# Altium PCB 智能车主板.PcbDoc (part 1 of 2)
Units mm, origin at the board's own origin, x right, y up, seen from the top; angles counter-clockwise.
Board outline 100.45 x 65.28 mm, 4 copper layers (Top, GND02, PWR03, Bottom), stack 0.603 mm thick; 92 components, 74 nets, 364 pads, 217 vias.
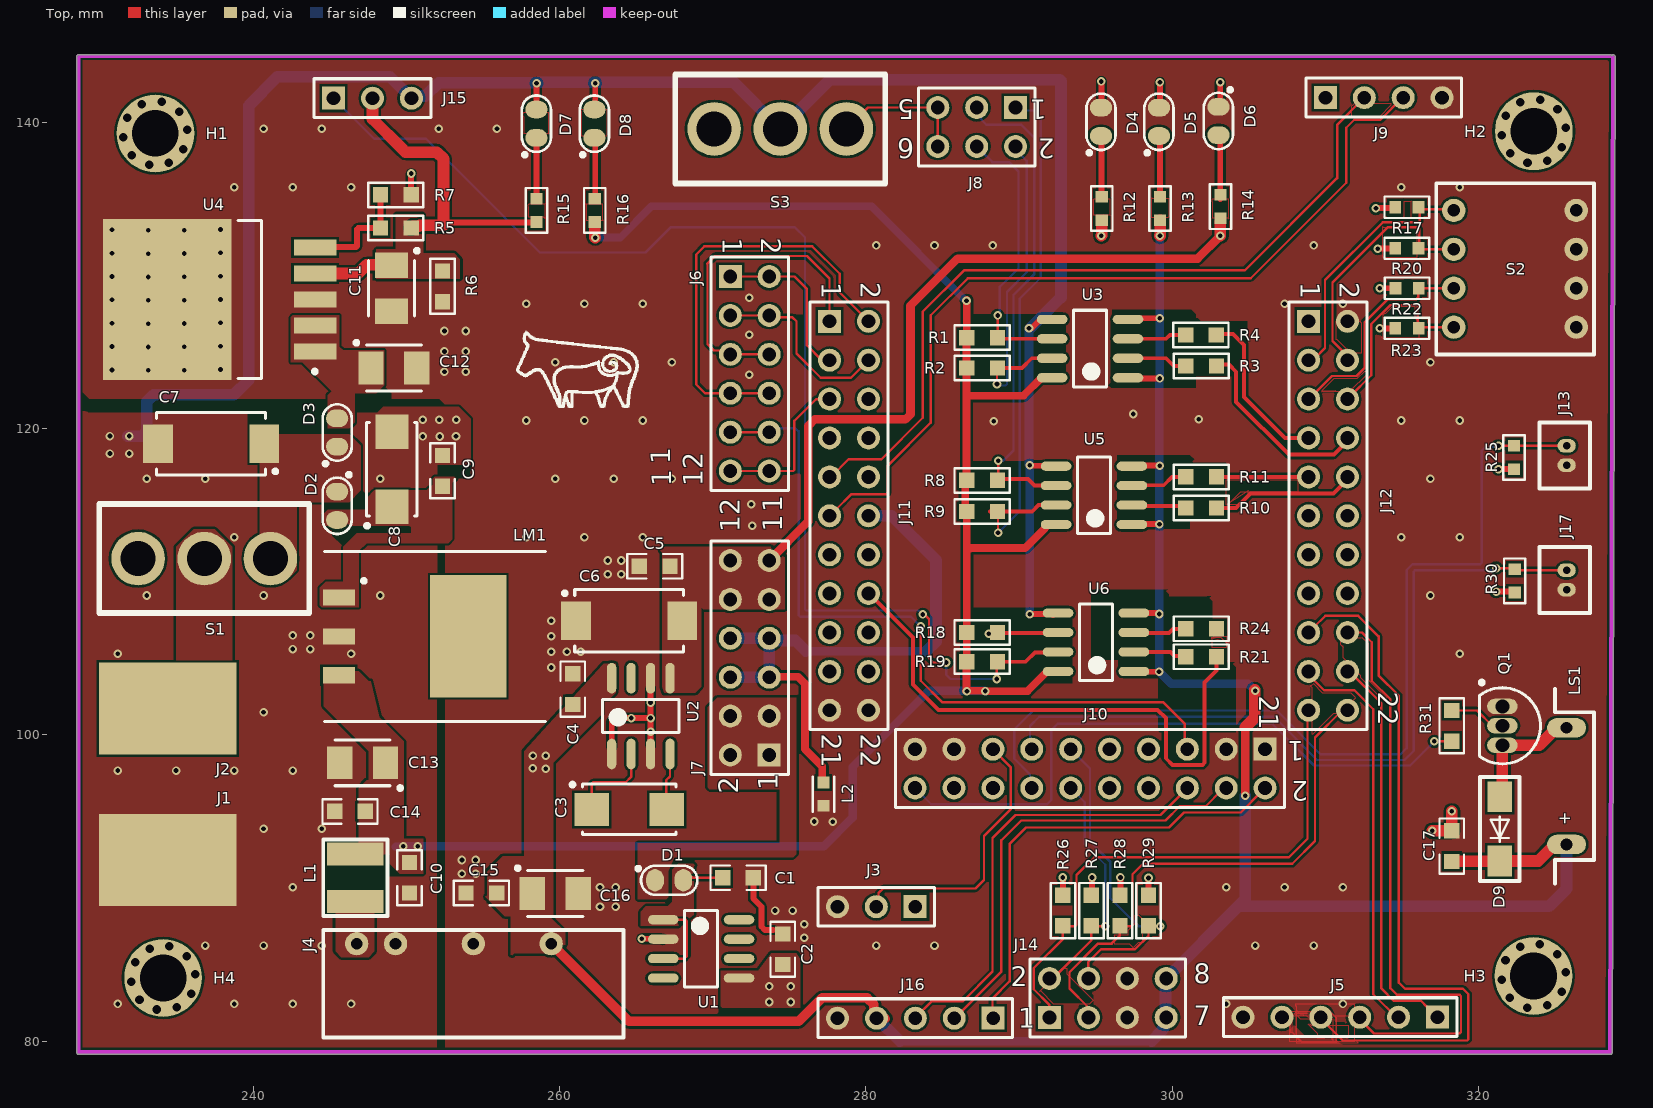
[diagram p0: Top view]
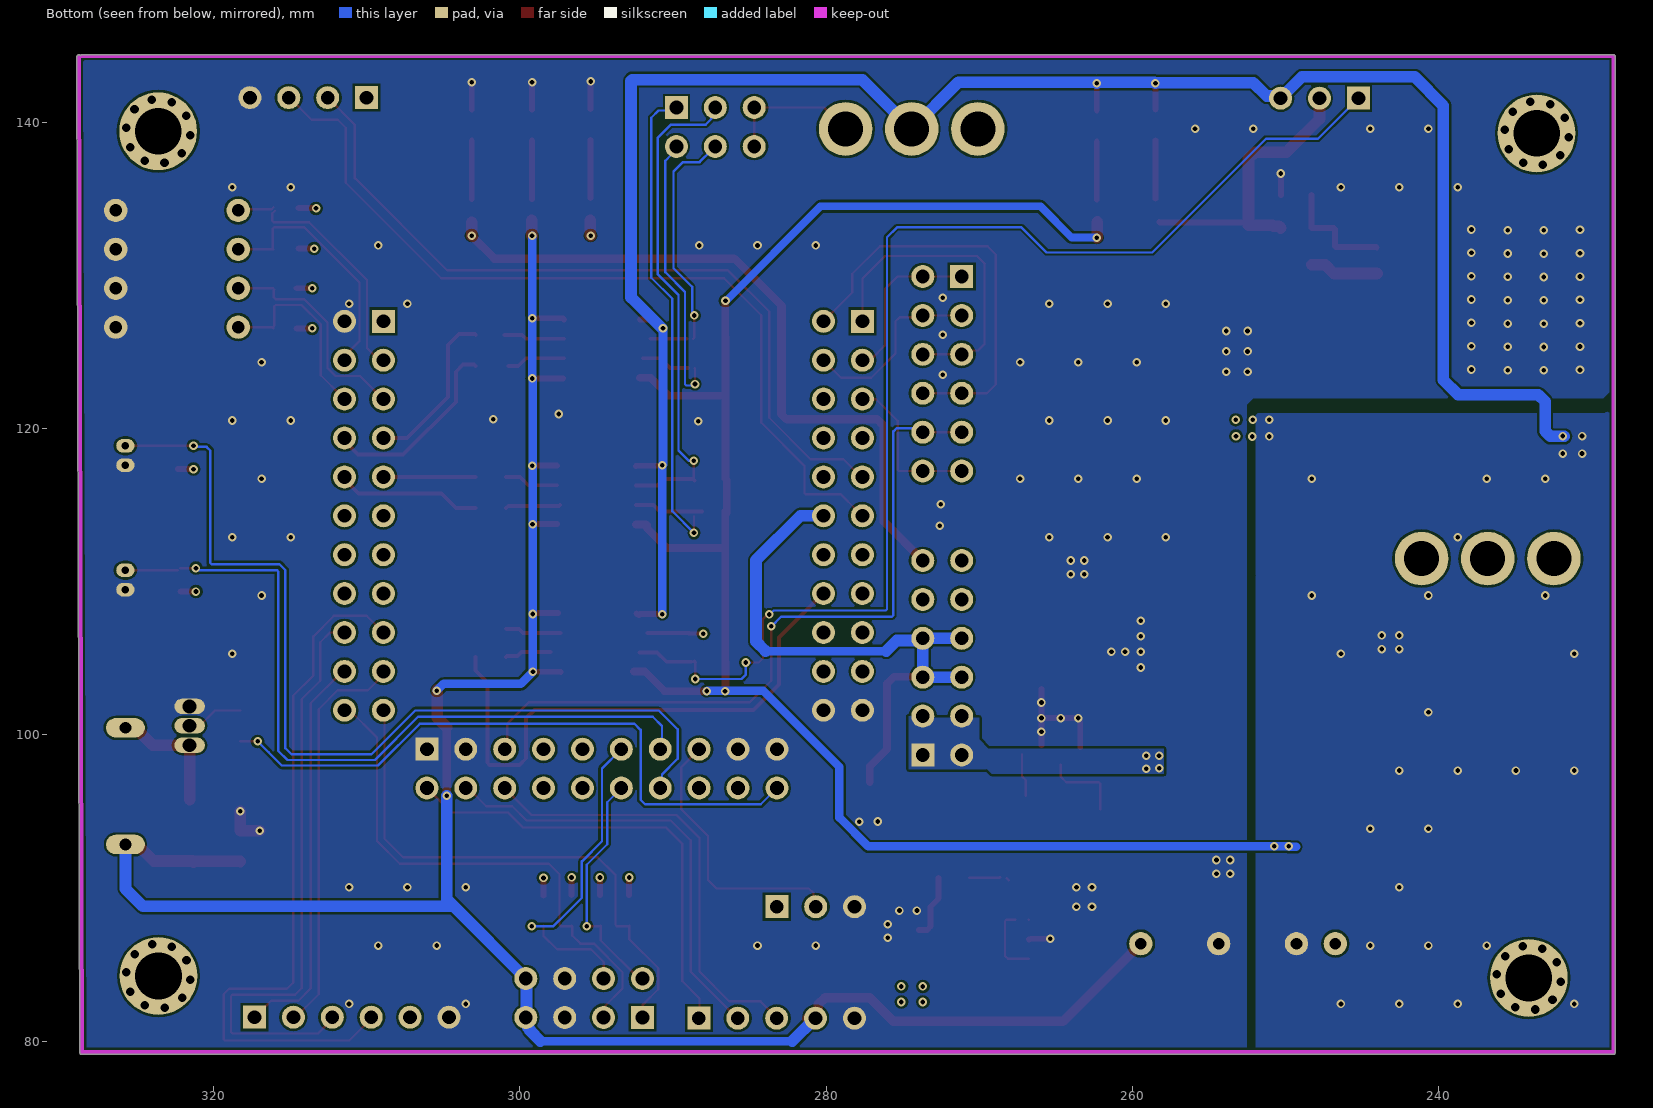
[diagram p1: Bottom view, seen from below]
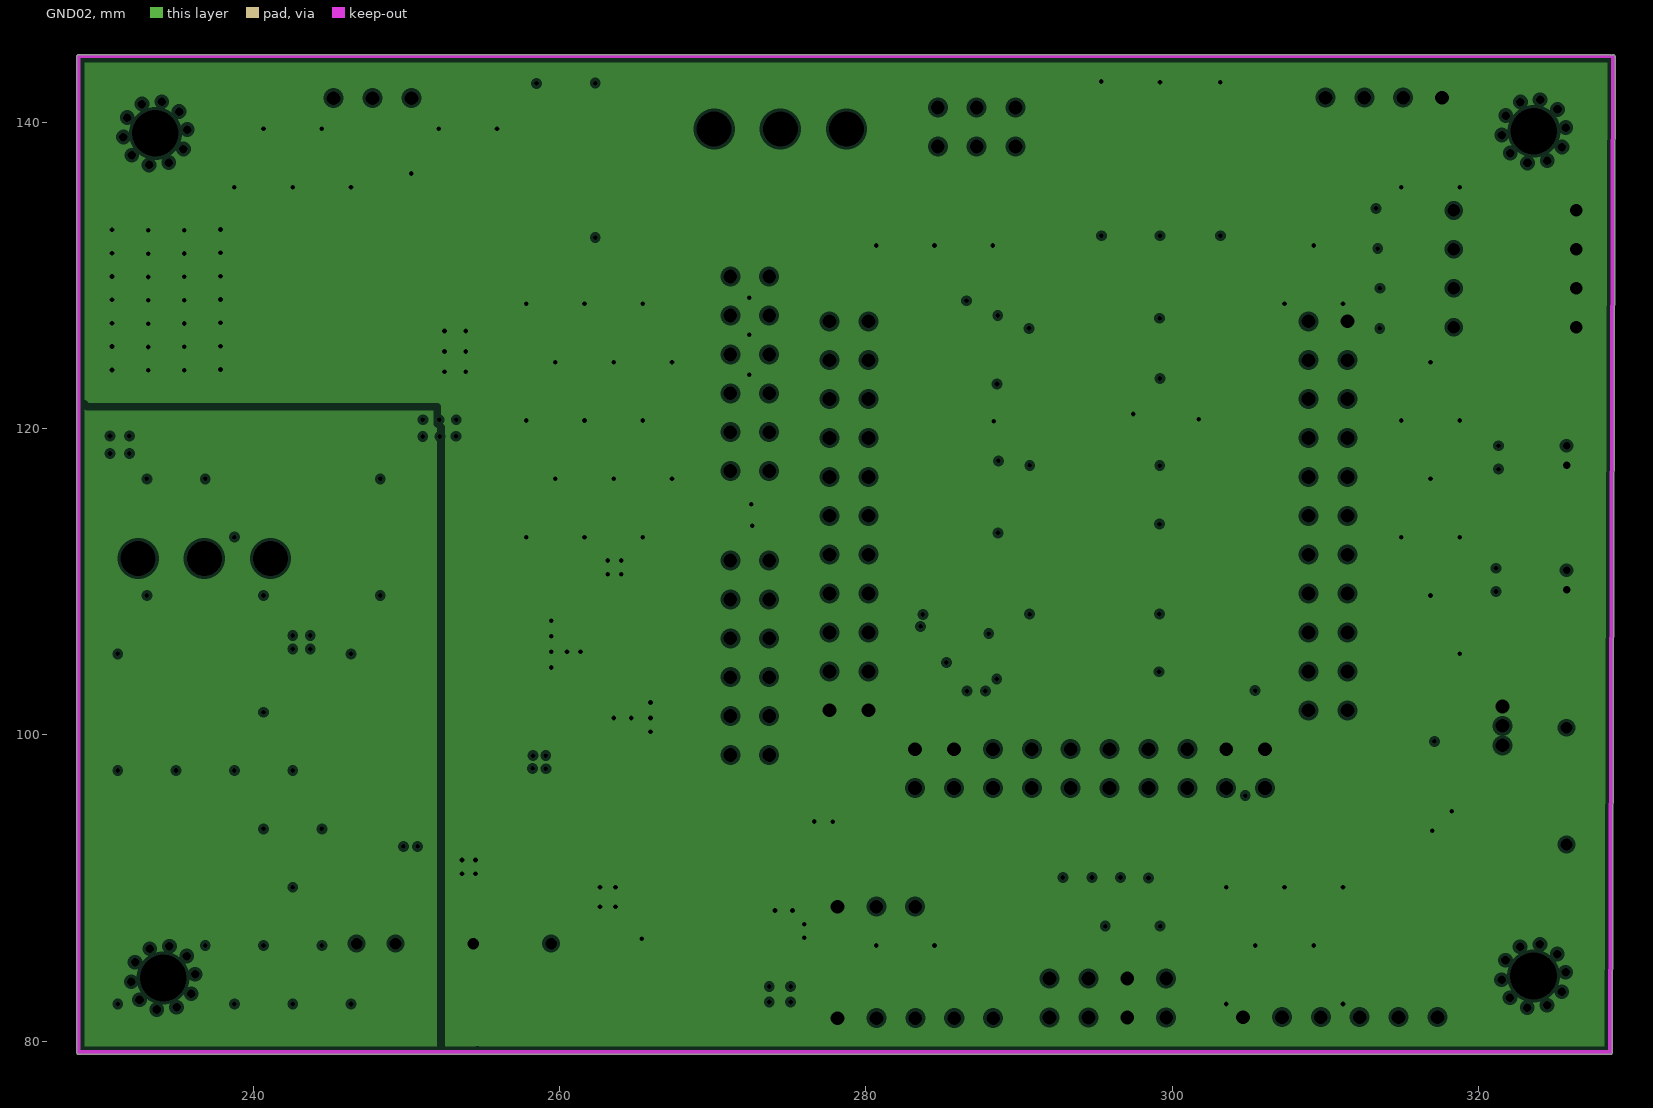
[diagram p2: GND02, clearances drawn from the general rule]
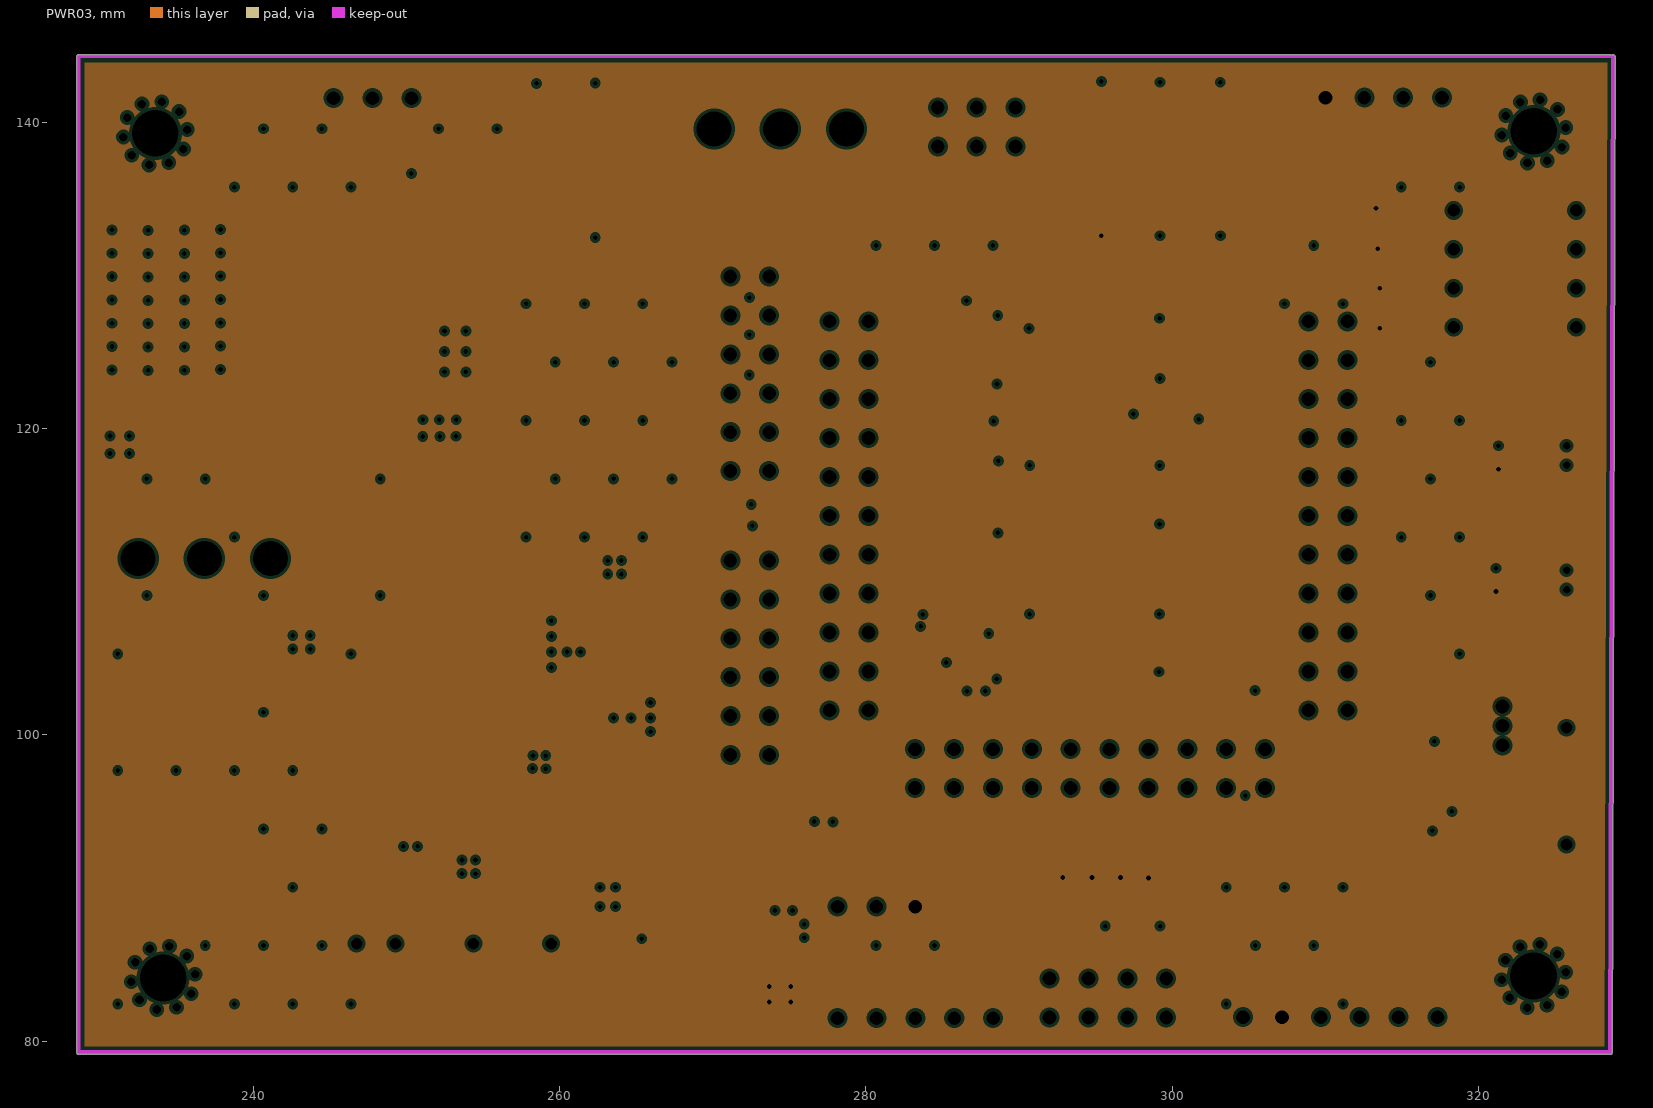
[diagram p3: PWR03, clearances drawn from the general rule]

## Layer stack, top to bottom
Top Solder: solder mask 0.0102, Solder Resist, Dk 3.5
Top: signal copper 0.0356
Dielectric 2: prepreg 0.0711, PP-006, Dk 4.1
GND02: plane copper 0.035, net GND
Dielectric 1: dielectric 0.32, FR-4, Dk 4.8
PWR03: plane copper 0.035, net VCC3.3
Dielectric 3: prepreg 0.0711, PP-006, Dk 4.1
Bottom: signal copper 0.0356
Bottom Solder: solder mask 0.0102, Solder Resist, Dk 3.5

## Board outline
228.473,79.26 cw(c228.6,79.272) 228.473,79.272 228.473,144.272 cw(c228.6,144.272) 228.6,144.399 328.6,144.399 cw(c328.6,144.272) 328.7,144.351 cw(c328.799,144.272) 328.926,144.272 cw(c328.799,144.272) 328.926,144.272 328.727,79.248 ccw(c328.6,79.248) 328.727,79.248 cw(c328.6,79.248) 328.6,79.121 228.6,79.121 cw(c228.6,79.248)

## Design rules (kind name [scope] priority, off if disabled: settings)
Clearance [All] p1: gap=0.152 ignorepadtopadclearanceinfootprint=FALSE
PlaneClearance [All] p1: clearance=0.203
PlaneConnect [All] p1: planeconnectstyle=Direct reliefexpansion=0.508 reliefentries=4 reliefconductorwidth=0.254 reliefairgap=0.254
PolygonConnect [All] p1: connectstyle=Direct reliefconductorwidth=0.254 reliefentries=4 polygonreliefangle="90 Angle" airgapwidth=0.254
RoomDefinition 智能车主板 [InComponentClass('智能车主板')] p1: confinementstyle=ConfineIn formatcopy=TRUE lockcomponents=FALSE outline -54.61,-43.307 -3.81,-43.307 -3.81,-17.907 -54.61,-17.907
RoutingVias [All] p1: holewidth=0.305 width=0.559 viastyle="Through Hole" minholewidth=0.305 minwidth=0.559 maxholewidth=0.305 maxwidth=0.559
SilkToSilkClearance [All] p1: silktosilkclearance=0.051
SilkToSolderMaskClearance [IsPad] p1: minsilkscreentomaskgap=0.051 clearancetoexposedcopper=TRUE
SolderMaskExpansion [All] p1: expansion=0.102 istentingtop=FALSE
Width PWR [InNetClass('PWR')] p1: maxlimit=1.524 minlimit=0.381 preferedwidth=0.381
Width [All] p2: maxlimit=0.152 minlimit=0.152 preferedwidth=0.152
26 further rules are at their usual default settings.

## Classes and differential pairs
net class PWR: AGND GGND GND NetD9_1 V5 V6 VBAT VBAT+ VCC VCC3.3 VCC5 VCC-5

## Components (designator, comment, footprint, x,y, rotation, side; value= is the part's Value field where it differs from the comment)
C1 "4.7uF" 0805C 271.65,90.666 r0 top
C2 "4.7uF" 0805C 274.574,85.995 r90 top
C3 "47uF" C型钽电容_6032_28 264.541,95.123 r0 top
C4 "10uF" 0805C 260.858,102.981 r270 top
C5 "0.1uF" 0805C 266.208,110.998 r180 top
C6 "100uF" D型钽电容_7343_31 264.535,107.442 r0 top
C7 "47uF" D型钽电容_7343_31 237.236,118.999 r180 top
C8 "22uf" C型钽电容_6032_28 249.047,117.348 r90 top
C9 "0.1uF" 0805C 252.349,117.237 r270 top
C10 "4.7uF" 0805C 250.19,90.662 r270 top
C11 "22uF" B型钽电容_3528_21 249.026,129.159 r270 top
C12 "22uF" B型钽电容_3528_21 249.174,123.952 r0 top
C13 "22uf" B型钽电容_3528_21 247.132,98.171 r180 top
C14 "0.1uF" 0805C 246.307,94.996 r180 top
C15 "0.1uF" 0805C 254.889,89.662 r180 top
C16 "22uF" B型钽电容_3528_21 259.715,89.641 r0 top
C17 "104" 0805C 318.262,92.726 r90 top
D1 "SS34" 0805_Dio 267.154,90.499 r0 top
D2 "SS34" 0805_Dio 245.474,114.948 r270 top
D3 "SS34" 0805_Dio 245.474,119.738 r90 top
D4 "LED" 0805_Dio 295.351,140.029 r90 top
D5 "LED" 0805_Dio 299.136,140.029 r90 top
D6 "LED" 0805_Dio 303.022,140.081 r270 top
D7 "LED" 0805_Dio 258.484,139.906 r90 top
D8 "LED" 0805_Dio 262.268,139.906 r90 top
D9 "SS34" SS34_3D 321.391,93.853 r270 top
H1 "固定孔" 铜柱孔3 233.6,139.272 r0 top
H2 "固定孔" 铜柱孔3 323.616,139.407 r0 top
H3 "固定孔" 铜柱孔3 323.6,84.248 r0 top
H4 "固定孔" 铜柱孔3 234.108,84.121 r0 top
J1 "-" 单面焊盘2*3MM_1PIN#1 234.408,91.821 r90 top
J2 "-" 单面焊盘2*3MM_1PIN#2 234.408,101.727 r90 top
J3 "AD-KEY" HDR1X3 283.218,88.77 r180 top
J4 "CON4" B0505S-2W 253.094,86.36 r0 top
J5 "OLED" HDR1X6 317.327,81.557 r180 top
J6 "CON12" HDR2X6 271.145,129.921 r270 top
J7 "CON12" HDR2X6 273.685,98.679 r90 top
J8 "motor drive" HDR2X3 289.775,140.957 r180 top
J9 "bluetooth" HDR1X4 310.007,141.605 r0 top
J10 "HEADER 10X2" HDR2X10 306.07,99.06 r180 top
J11 "HEADER 11X2" HDR2X11 277.63,127 r270 top
J12 "HEADER 11X2" HDR2X11 308.91,127 r270 top
J13 "CON2" 2PIN杜邦插座_1.27mm 325.755,118.872 r270 top
J14 "BM" HDR2X4 291.988,81.541 r0 top
J15 "AD-KEY" HDR1X3 245.237,141.569 r0 top
J16 "CCD" HDR1X5 288.309,81.492 r180 top
J17 "CON2" 2PIN杜邦插座_1.27mm 325.755,110.744 r270 top
L1 "6.8uH" CDRH3D16_4.2*1.8 246.659,90.668 r180 top
L2 "100M" 0603L 277.227,96.12 r270 top
LM1 "lm2940" LM2940 253.619,106.299 r0 top
LS1 "Bell" 蜂鸣器侧装 325.755,97.917 r90 top
Q1 "2N3904" TO-92A 321.564,100.584 r180 top
R1 "1k" 0805R 287.591,125.935 r0 top
R2 "1k" 0805R 287.591,123.952 r0 top
R3 "1K" 0805R 301.895,124.079 r180 top
R4 "1K" 0805R 301.879,126.111 r180 top
R5 "3.9k" 0805R 249.301,133.096 r180 top
R6 "1k" 0805R 252.349,129.286 r270 top
R7 "1k" 0805R 249.301,135.255 r0 top
R8 "1k" 0805R 287.591,116.612 r0 top
R9 "1k" 0805R 287.591,114.58 r0 top
R10 "1k" 0805R 301.895,114.808 r180 top
R11 "1k" 0805R 301.895,116.84 r180 top
R12 "1k" 0603R 295.402,134.366 r90 top
R13 "2.2k" 0603R 299.212,134.366 r90 top
R14 "3.3k" 0603R 303.149,134.493 r90 top
R15 "3.3k" 0603R 258.484,134.243 r90 top
R16 "3.3k" 0603R 262.294,134.243 r90 top
R17 "1k" 0603R 315.322,134.443 r180 top
R18 "1k" 0805R 287.591,106.68 r0 top
R19 "1k" 0805R 287.591,104.775 r0 top
R20 "1k" 0603R 315.329,131.765 r180 top
R21 "1k" 0805R 301.895,105.09 r180 top
R22 "1k" 0603R 315.341,129.159 r180 top
R23 "1k" 0603R 315.334,126.538 r180 top
R24 "1k" 0805R 301.895,106.924 r180 top
R25 "1k" 0603R 322.326,118.108 r90 top
R26 "1k" 0805R 292.862,88.519 r90 top
R27 "1k" 0805R 294.725,88.519 r90 top
R28 "1k" 0805R 296.587,88.519 r90 top
R29 "1k" 0805R 298.45,88.519 r90 top
R30 "1k" 0603R 322.362,110.048 r90 top
R31 "1k" 0805R 318.262,100.584 r90 top
S1 "SW-SPST" 开关 240.73,105.029 r270 top
S2 "SW DIP-4" 4路拨码开关 318.771,132.842 r0 top
S3 "SW-SPST" 开关 278.345,133.083 r270 top
U1 "TPS7633" SOP_8(OPA) 269.24,86.016 r0 top
U2 "LM2663" SOP_8(OPA) 265.303,101.219 r90 top
U3 "HCPL0631" SOP_8(OPA) 294.64,125.222 r180 top
U4 "9302" TO_263_5(10.5*8.4mm) 238.388,128.524 r0 top
U5 "HCPL0631" SOP_8(OPA) 294.894,115.633 r180 top
U6 "HCPL0631" SOP_8(OPA) 295.021,106.045 r180 top

## Footprints (in the part's own frame and the unit in brackets; to place one, negate y for a bottom-side part, rotate by r counter-clockwise, add the part's x,y. Pads: shape width x height; smd on the part's side, far side on the other; paste and mask are expansions set on the pad)
2PIN杜邦插座_1.27mm [mm]
  oval 0.9x1.2 hole 0.5: 1(0,0) 2(1.27,0)
  silkscreen extent -1.52,-1.78 2.79,1.52
4路拨码开关 [mil]
  round 60 hole 32.01: 1(-15,55) 2(-15,-45) 3(-15,-145) 4(-15,-245) 5(299.96,-245) 6(299.96,-145) 7(299.96,-45) 8(299.96,55)
  silkscreen extent -60,-315 345,125
0603L [mm]
  rect 0.76x0.8 smd: 1(-0.76,0) 2(0.76,0)
  silkscreen extent -1.15,-0.7 1.15,0.7
0603R [mm]
  rect 0.76x0.8 smd: 1(-0.76,0) 2(0.76,0)
  silkscreen extent -1.46,-0.7 1.46,0.7
0805_Dio [mm] "Chip Capacitor, 2-Leads, Body 2.0x1.3mm, IPC Medium Density"
  oval 1.15x1.45 smd: 1(-0.925,0) 2(0.925,0)
  silkscreen extent -2.15,-0.95 1.84,0.95, body extent -1,-0.64 1,0.64, height 0.6
0805C [mm]
  rect 1x1 smd: 1(-1,0) 2(1,0)
  silkscreen extent -1.8,-0.8 1.8,0.8
0805R [mm]
  rect 1x1 smd: 1(-1,0) 2(1,0)
  silkscreen extent -1.8,-0.8 1.8,0.8
B0505S-2W [mil]
  round 60 hole 30: 1(-250,0) 2(-150,0) 3(50,0) 4(250,0)
  silkscreen extent -336,-241 436,35
B型钽电容_3528_21 [mm] "Molded Capacitor, 2-Leads, Body 3.5x2.8mm, IPC Medium Density"
  rect 1.65x2.15 smd: 1(-1.5,0) 2(1.5,0)
  silkscreen extent -2.57,-1.5 1.8,1.78, body extent -1.8,-1.45 1.8,1.45, height 1.9
CDRH3D16_4.2*1.8 [mm]
  rect 3.7x1.5 smd: 1(0,-1.55) 2(0,1.55)
  silkscreen extent -2.1,-2.5 2.1,2.5
C型钽电容_6032_28 [mm] "Molded Capacitor, 2-Leads, Body 6.0x3.2mm, IPC Medium Density"
  rect 2.25x2.15 smd: 1(-2.45,0) 2(2.45,0)
  silkscreen extent -3.82,-1.65 3.05,1.75, body extent -3,-1.6 3,1.6, height 2.5
D型钽电容_7343_31 [mm] "Molded Capacitor, 2-Leads, Body 7.3x4.3mm, IPC Medium Density"
  rect 1.95x2.5 smd: 1(-3.475,0) 2(3.475,0)
  silkscreen extent -4.32,-2.05 3.55,2.05, body extent -3.65,-2.15 3.65,2.15, height 2.8
HDR1X3 [mm] "Connector; Header; 3 Position"
  rect 1.5x1.5 hole 0.9: 1(0,0)
  round 1.5 hole 0.9: 2(2.54,0) 3(5.08,0)
  silkscreen extent -1.27,-1.27 6.35,1.27
HDR1X4 [mm] "Connector; Header; 4 Position"
  rect 1.5x1.5 hole 0.9: 1(0,0)
  round 1.5 hole 0.9: 2(2.54,0) 3(5.08,0) 4(7.62,0)
  silkscreen extent -1.27,-1.27 8.89,1.27
HDR1X5 [mm] "Connector; Header; 5 Position"
  rect 1.5x1.5 hole 0.9: 1(0,0)
  round 1.5 hole 0.9: 2(2.54,0) 3(5.08,0) 4(7.62,0) 5(10.16,0)
  silkscreen extent -1.27,-1.27 11.43,1.27
HDR1X6 [mm] "Connector; Header; 6 Position"
  rect 1.5x1.5 hole 0.9: 1(0,0)
  round 1.5 hole 0.9: 2(2.54,0) 3(5.08,0) 4(7.62,0) 5(10.16,0) 6(12.7,0)
  silkscreen extent -1.27,-1.27 13.97,1.27
HDR2X3 [mm] "Connector; Header; 3x2 Position"
  rect 1.5x1.5 hole 0.9: 1(0,0)
  round 1.5 hole 0.9: 2(0,2.54) 3(2.54,0) 4(2.54,2.54) 5(5.08,0) 6(5.08,2.54)
  silkscreen extent -1.27,-1.27 6.35,3.81
HDR2X4 [mm] "Connector; Header; 4x2 Position"
  rect 1.5x1.5 hole 0.9: 1(0,0)
  round 1.5 hole 0.9: 2(0,2.54) 3(2.54,0) 4(2.54,2.54) 5(5.08,0) 6(5.08,2.54) 7(7.62,0) 8(7.62,2.54)
  silkscreen extent -1.27,-1.27 8.89,3.81
HDR2X6 [mm] "Connector; Header; 6x2 Position"
  rect 1.5x1.5 hole 0.9: 1(0,0)
  round 1.5 hole 0.9: 2(0,2.54) 3(2.54,0) 4(2.54,2.54) 5(5.08,0) 6(5.08,2.54) 7(7.62,0) 8(7.62,2.54) 9(10.16,0) 10(10.16,2.54) 11(12.7,0) 12(12.7,2.54)
  silkscreen extent -1.27,-1.27 13.97,3.81
HDR2X10 [mm] "Connector; Header; 10x2 Position"
  rect 1.5x1.5 hole 0.9: 1(0,0)
  round 1.5 hole 0.9: 2(0,2.54) 3(2.54,0) 4(2.54,2.54) 5(5.08,0) 6(5.08,2.54) 7(7.62,0) 8(7.62,2.54) 9(10.16,0) 10(10.16,2.54) 11(12.7,0) 12(12.7,2.54) 13(15.24,0) 14(15.24,2.54) 15(17.78,0) 16(17.78,2.54) 17(20.32,0) 18(20.32,2.54) 19(22.86,0) 20(22.86,2.54)
  silkscreen extent -1.27,-1.27 24.13,3.81
HDR2X11 [mm] "Connector; Header; 11x2 Position"
  rect 1.5x1.5 hole 0.9: 1(0,0)
  round 1.5 hole 0.9: 2(0,2.54) 3(2.54,0) 4(2.54,2.54) 5(5.08,0) 6(5.08,2.54) 7(7.62,0) 8(7.62,2.54) 9(10.16,0) 10(10.16,2.54) 11(12.7,0) 12(12.7,2.54) 13(15.24,0) 14(15.24,2.54) 15(17.78,0) 16(17.78,2.54) 17(20.32,0) 18(20.32,2.54) 19(22.86,0) 20(22.86,2.54) 21(25.4,0) 22(25.4,2.54)
  silkscreen extent -1.27,-1.27 26.67,3.81
LM2940 [mm]
  rect 2.1x1.05 smd: 1(-8.035,2.667) 2(-8.035,0.127) 3(-8.035,-2.413)
  rect 5x8 smd: 4(0.415,0.127)
  silkscreen extent -8.98,-5.42 5.47,5.68
SOP_8(OPA) [mm] "SOIC, 8-Leads, Body 5.0x4.0mm (max), Pitch 1.27mm, IPC Medium Density"
  oval 2x0.6 smd: 1(-2.475,1.905) 2(-2.475,0.635) 3(-2.475,-0.635) 4(-2.475,-1.905) 5(2.475,-1.905) 6(2.475,-0.635) 7(2.475,0.635) 8(2.475,1.905)
  silkscreen extent -1.07,-2.5 1.08,2.5, body extent -2,-2.5 2,2.5, height 1.75
SS34_3D [mm]
  rect 2x1.6 smd: 1(-2.1,0) 2(2.1,0)
  silkscreen extent -3.4,-1.3 3.4,1.3, body extent -2.46,-1.36 2.54,1.34, height 2.15
TO-92A [mm] "TO, Flat Index; 3 In-Line, Axial Leads; Body Dia. 4.5mm; Leads 0.51 x 0.48 mm (max)"
  oval 2x1 hole 0.9: 1(0,-1.27) 2(0,0) 3(0,1.27)
  silkscreen extent -2.48,-2.95 1.5,2.48, body extent -2.48,-2.5 1.5,2.5, height 6.86
TO_263_5(10.5*8.4mm) [mm] "D2-PAK, 6-Pads, Body 8.8x10.3mm (max), IPC Medium Density"
  rect 2.8x1.05 smd: 1(5.65,-3.5) 2(5.65,-1.8) 3(5.65,-0.1) 4(5.65,1.6) 5(5.65,3.3)
  rect 8.4x10.5 smd: 3(-4,-0.1)
  silkscreen extent 0.6,-5.25 5.75,5.05, body extent -8.63,-5.1 7.03,4.9
单面焊盘2*3MM_1PIN#1 [mm]
  rect 6x9 smd: 1(0,0)
单面焊盘2*3MM_1PIN#2 [mm]
  rect 6x9 smd: VBAT+(0,0)
开关 [mil]
  round 137.8 hole 90: 1(-255,15) 2(-255,-155) 3(-255,-325)
  silkscreen extent -395,-425 -115,115
蜂鸣器侧装 [mil]
  oval 50x100 hole 30: 1(-200,0) 2(100,0)
  silkscreen extent -300,-70 200,30
铜柱孔3 [mil]
  round 23 hole 22: 11(-82.21,-9.67) 11(-72.19,40.5) 11(-60.83,-56.14) 11(-34.6,75.2) 11(-16.21,-81.17) 11(16.21,81.17) 11(34.6,-75.2) 11(60.83,56.14) 11(72.19,-40.5) 11(82.21,9.67)
  round 200 hole 120: 11(0,0)

## Part data
C1 C2 C4 C5 C9 C10 C14 C15 C17: library part CAP, "电容"
C3 C6 C7 C8 C11 C12 C13 C16: library part 极性电容, "极性电容"
D1 D2 D3 D9: "二极管"
J1 J2: library part CON1, "Connector"
J3 J15: library part CON3, "SOCKET"
J4 J6 J7 J13 J17: "Connector"
J5 J8: library part CON6, "Connector"
J9: library part CON4, "Connector"
J10: "排插"
J11 J12: "排针"
J14: library part CON8, "Connector"
J16: library part CON5, "Connector"
L1: library part INDUCTOR, "电感"
L2: library part INDUCTOR2, "电感"
LM1 U2: "IC"
LS1: "Electrical Bell", LatestRevisionDate=17-Jul-2002, LatestRevisionNote="Re-released for DXP Platform.", PackageReference=PIN2, Published=24-Mar-1999, Publisher="Altium Limited"
Q1: "NPN General Purpose Amplifier", PackageDocument=Sep-1998, Code_JEDEC=TO-92A, ComponentLink1Description="Manufacturer Link", ComponentLink1URL=http://www.fairchildsemi.com/, ComponentLink2Description=Datasheet, ComponentLink2URL=http://www.fairchildsemi.com/ds/2N%2F2N3904.pdf, DatasheetDocument=1997, LatestRevisionDate=15-Jan-2003, LatestRevisionNote="PCB Footprint 'BCY-W3/D4.7' replaced", PackageReference=TO-92A, Published=8-Jun-2000, Publisher="Altium Limited"
R1 R2 R3 R4 R5 R6 R7 R8 R9 R10 R11 R12 R13 R14 R15 R16 R17 R18 R19 R20 R21 R22 R23 R24 R25 R26 R27 R28 R29 R30 R31: library part RES, "电阻"
S1 S3: "Single-Pole, Single-Throw Switch", LatestRevisionDate=17-Jul-2002, LatestRevisionNote="Re-released for DXP Platform.", PackageDescription="Switch; 2 Leads", PackageReference=SPST-2, Published=24-Mar-1999, Publisher="Altium Limited"
S2: "DIP Switch"
U1: library part TPS73633, "IC"
U3 U5 U6: "光耦"
U4: library part MIC29302, "IC"

## Via types
v1: diameter 0.559, hole 0.305, Top to Bottom, tented both sides, 216 vias
v2: diameter 0.559, hole 0.305, Top to Bottom, 1 vias

## Nets (pads, with @x,y where several pads share a name; then routed paths per layer and width w, separated by ;. In a path a pad name is that pad's centre, name@x,y a point inside that pad or via, vN(x,y) a via of type N, cw(c..) or ccw(c..) an arc to the next point about the centre after c; other vN are vias at no path point)
3: R18.2 U6.6 | length 3.7
  Top w0.254: v1(288.021,106.603) R18.2@288.959,106.603 ; R18.2@288.917,106.642 U6.6@291.675,106.642
A1: J11.7
ADB2: J6.9 J6.10 J10.5 | length 48.7
  Top w0.152: J6.9@271.145,119.761 J6.10@273.685,119.761 J6.10@273.812,119.761 ; v1@283.576,107.029 283.576,103.529 284.975,102.13 299.399,102.13 300.828,100.701 300.828,99.222 J10.5@300.99,99.06
  Bottom w0.152: J6.10@273.641,119.832 273.819,120.01 275.407,120.01 275.606,119.811 275.606,107.803 275.695,107.714 282.934,107.714 v1(283.571,107.077)
ADE20: J6.1 J6.2 J11.3 | length 10.9
  Top w0.152: J6.1@271.145,129.921 273.558,129.921 J6.2@273.621,129.984 ; J6.2@273.685,129.921 275.336,129.921 276.144,129.113 276.144,125.43 277.106,124.468 J11.3@277.622,124.468
ADE21: J6.3 J6.4 J11.4 | length 12.4
  Top w0.152: J6.3@271.145,127.381 J6.4@273.685,127.381 273.812,127.254 275.209,127.254 275.463,127 275.463,124.905 277.051,123.317 279.027,123.317 J11.4@280.162,124.452
ADE22: J6.5 J6.6 J11.1 | length 21.2
  Top w0.152: 269.64,130.76 269.65,130.77 ; J6.6@273.685,124.841 J6.5@271.145,124.841 270.891,125.095 270.075,125.095 269.65,125.52 269.65,130.77 ; J11.1@277.622,127 277.622,129.794 276.149,131.267 270.147,131.267 269.65,130.77
ADE23: J6.7 J6.8 J11.2 | length 27.7
  Top w0.152: J6.8@273.685,122.301 J6.7@271.145,122.301 269.494,122.301 268.915,122.88 268.915,131.36 269.449,131.894 276.499,131.894 278.295,130.099 278.295,128.877 280.17,127.002 J11.2@280.17,127
ADE29: J11.6
ADE30: J6.11 J6.12 J11.5 | length 10.3
  Top w0.152: J6.11@271.145,117.221 275.232,117.221 275.321,117.31 275.321,120.496 276.741,121.915 277.617,121.915 J11.5@277.622,121.92
AGND: J7.5 J7.6 J7.7 J7.8 J11.12 L2.1 | length 39.8
  Top w0.381: J7.7@273.54,106.299 J7.7@273.654,106.413
  Top w0.508: J7.5@273.717,103.791 275.568,103.791 276.014,103.345 276.014,99.072 277.155,97.932 L2.1@277.155,96.915
  Top w0.762: J7.5@273.685,103.759 J7.5@273.717,103.791 ; J11.12@280.089,114.122 J11.12@280.089,114.455
  Bottom w0.559: 276.076,105.467 283.956,105.467
  Bottom w0.762: J7.6@271.145,103.759 J7.5@273.685,103.759 J7.7@273.685,106.299 273.826,106.158 275.386,106.158 276.076,105.467 ; J7.8@271.145,106.299 J7.7@273.541,106.299 ; J11.12@280.17,114.3 281.669,114.3 284.582,111.387 284.582,106.094 283.956,105.467
B16: J10.11 J14.4 R29.1 | length 21.2
  Top w0.152: J14.4@294.513,84.074 294.513,85.156 295.348,85.991 297.573,85.991 298.45,86.868 R29.1@298.45,87.519
  Bottom w0.152: J10.11@293.37,99.06 294.632,97.798 294.632,93.044 295.945,91.731 295.945,89.358 297.019,88.284 297.8,87.503 v1(299.212,87.503)
B17: J10.12 J14.2 R27.1 | length 15.4
  Top w0.152: J14.2@291.973,84.074 292.218,84.074 294.725,86.58 R27.1@294.725,87.519 ; R27.1@294.742,87.522 294.758,87.506 v1(295.631,87.506)
  Bottom w0.152: J10.12@293.37,96.52 294.295,95.595 294.295,92.848 295.631,91.512 295.631,87.693 v1@295.59,87.652
C0: J3.2 J10.15 | length 17.9
  Top w0.152: J3.2@280.566,88.872 280.827,89.133 280.827,89.659 281.128,89.961 287.149,89.961 287.708,90.519 287.708,93.383 289.45,95.126 289.45,97.9 J10.15@288.29,99.06
C1: J10.16
C2: J10.18
C3: J10.20 R31.1 | length 42
  Top w0.152: v1@317.135,99.584 R31.1@318.262,99.584
  Bottom w0.152: J10.20@283.21,96.52 284.271,95.459 291.821,95.459 292.113,95.752 292.113,100.318 292.518,100.723 306.528,100.723 309.259,97.992 315.543,97.992 316.403,98.852 v1@317.052,99.501
  other v1: 317.119,99.568
C4: J12.22 J14.3 R28.1 | length 34.9
  Top w0.152: J14.3@294.513,81.534 294.513,82.208 293.295,83.426 293.295,84.498 295.157,86.36 296.046,86.36 296.566,86.88 296.566,87.498 R28.1@296.587,87.519 ; R28.1@296.647,87.522 296.665,87.503 297.325,87.503 297.414,87.592 297.414,90.889 298.104,91.579 307.839,91.579 309.33,93.07 309.33,99.82 311.11,101.6 J12.22@311.45,101.6
C5: J12.21 J14.1 R26.1 | length 35.8
  Top w0.152: J14.1@291.973,81.534 291.962,81.545 291.962,82.39 290.966,83.386 290.966,84.763 292.862,86.659 R26.1@292.862,87.519 292.878,87.503 293.662,87.503 293.751,87.592 293.751,90.834 294.909,91.992 294.994,91.992 ; 294.994,92.001 307.629,92.001 308.841,93.213 308.841,101.531 J12.21@308.91,101.6
C6: J5.1 J12.20 | length 26.1
  Top w0.152: J12.20@311.45,104.14 311.579,104.14 313.661,102.058 313.661,83.427 314.453,82.635 316.242,82.635 316.646,82.231 316.654,82.231 317.275,81.609 J5.1@317.275,81.601
C7: J5.2 J12.19 | length 26.2
  Top w0.152: J12.19@309.026,104.201 309.026,103.794 309.911,102.909 311.899,102.909 313.137,101.672 313.137,83.057 J5.2@314.706,81.488
C8: J5.3 J12.18 | length 39.7
  Top w0.152: J12.18@311.45,106.68 312.395,106.68 313.035,106.04 313.035,103.531 314.237,102.329 314.237,83.454 314.672,83.019 318.771,83.019 318.861,82.929 318.861,80.583 318.771,80.494 313.181,80.494 312.24,81.435 J5.3@311.914,81.761 ; J5.3@312.247,81.557 312.261,81.543 312.261,81.457 J5.3@312.269,81.449
C9: J5.4 J12.17 | length 46.8
  Top w0.152: J12.17@308.88,107.018 309.248,107.018 309.991,107.761 312.145,107.761 313.482,106.425 313.482,103.877 314.802,102.557 314.802,83.812 315.205,83.409 318.991,83.409 319.338,83.063 319.338,80.12 319.248,80.03 311.14,80.03 J5.4@309.633,81.537
CCDB0: J10.2 J16.1 | length 30.1
  Top w0.152: J16.1@288.298,81.534 288.27,81.562 288.27,82.787 289.384,83.901 289.384,92.872 290.455,93.943 299.799,93.943 300.78,94.924 304.474,94.924 305.836,96.286 J10.2@306.225,96.286
CCDB1: J10.4 J16.2 | length 28.9
  Top w0.152: J16.2@285.758,81.534 285.842,81.534 288.846,84.538 288.846,93.105 290.144,94.403 299.556,94.403 300.49,95.337 302.187,95.337 303.238,96.388 J10.4@303.496,96.388
CCDB3: J10.6 J16.3 | length 29.1
  Top w0.152: J16.3@283.218,81.534 284.274,82.59 286.327,82.59 288.272,84.535 288.272,93.262 289.772,94.762 299.232,94.762 300.735,96.265 J10.6@301.095,96.265
D4: J12.6 R23.1 S2.4 | length 12.7
  Top w0.152: J12.6@311.505,122.086 311.616,122.086 313.005,123.475 313.005,126.815 314.259,128.069 315.943,128.069 316.032,127.979 316.032,126.688 R23.1@316.101,126.619 ; R23.1@316.094,126.538 316.157,126.601 318.372,126.601 S2.4@318.39,126.619
D5: J12.5 R22.1 S2.3 | length 14.5
  Top w0.152: J12.5@308.91,121.92 308.931,121.92 310.442,123.431 312.033,123.431 312.556,123.953 312.556,126.926 314.059,128.429 315.921,128.429 316.078,128.586 316.078,129.016 R22.1@316.027,129.067 ; R22.1@316.101,129.159 S2.3@318.39,129.159
D6: J12.4 R20.1 S2.2 | length 16.4
  Top w0.152: J12.4@311.45,124.46 311.45,124.737 310.465,125.721 310.465,129.537 314.061,133.133 316.035,133.133 316.124,133.044 316.124,131.722 316.101,131.699 318.262,131.699 S2.2@318.389,131.826
D7: J12.3 R17.1 S2.1 | length 16.8
  Top w0.152: J12.3@308.846,124.588 309.319,124.588 309.985,125.254 309.985,129.691 313.758,133.465 316.077,133.465 316.166,133.554 316.166,134.047 R17.1@315.989,134.224 ; R17.1@316.082,134.443 316.204,134.321 318.308,134.321 S2.1@318.39,134.239
GGND: C7.2 C8.2 C9.1 C10.2 C13.2 C14.2 D7.2 D8.2 J1.1 J4.2 J15.3 LM1.2 S3.2 U3.5 U5.5 U6.5 | length 130.3
  Top w0.381: D7.2@258.484,140.831 v1@258.484,142.541 ; D8.2@262.324,140.761 v1(262.324,142.555) ; v1(290.651,126.537) 290.685,126.571 290.85,126.571 291.406,127.127 U3.5@292.165,127.127 ; v1(290.695,107.877) 292.16,107.877 292.224,107.813 292.309,107.897 292.335,107.872 U6.5@292.375,107.912 ; v1(290.7,117.589) 290.725,117.564 292.394,117.564 U5.5@292.419,117.538
  Bottom w0.381: 292.65,142.779 292.873,142.556
  Bottom w0.559: v1(290.651,126.537) 290.651,117.634 290.695,117.589 v1(290.695,107.877)
  Bottom w0.762: v1@231.794,119.487 232.708,119.487 233.046,119.825 233.046,121.76 233.492,122.207 238.731,122.207 239.688,123.163 239.688,141.086 241.565,142.963 248.923,142.963 J15.3@250.176,141.71 ; J15.3@250.317,141.569 J15.3@250.176,141.71 ; S3.2@274.408,139.56 271.359,142.609 262.378,142.609 v1(262.324,142.555) 262.269,142.609 258.56,142.609 v1(258.492,142.541) 258.446,142.587 252.095,142.587 251.218,141.71 J15.3@250.176,141.71 ; S3.2@274.694,139.846 277.627,142.779 292.65,142.779 ; v1@290.751,126.57 292.74,128.559 292.74,142.689
  other v1: 231.14,82.423 238.76,82.423 242.57,82.423 246.38,82.423 236.855,86.233 240.665,86.233 244.475,86.233 242.57,90.043 240.665,93.853 244.475,93.853 231.14,97.663 234.95,97.663 238.76,97.663 242.57,97.663 240.665,101.473 231.14,105.283 246.38,105.283 242.57,105.598 243.713,105.598 242.57,106.487 243.713,106.487 233.045,109.093 240.665,109.093 248.285,109.093 238.76,112.903 233.045,116.713 236.855,116.713 248.285,116.713 230.632,118.364 231.902,118.364 251.061,119.482 252.177,119.477 230.632,119.507 231.902,119.507 253.232,119.496 251.066,120.57 252.135,120.57 253.246,120.57
GHGL: J10.13 J17.1 R30.2 | length 50
  Top w0.152: v1(321.149,110.875) 322.163,110.875 R30.2@322.165,110.873 ; R30.2@322.326,110.744 J17.1@325.755,110.744
  Bottom w0.152: J10.13@290.83,99.06 290.718,99.172 290.718,100.566 291.324,101.172 306.643,101.172 309.465,98.35 315.178,98.35 315.77,98.941 315.77,110.664 315.859,110.753 321.301,110.753 v1@321.31,110.744
GHGR: J10.14 J13.1 R25.2 | length 61.5
  Top w0.152: v1(321.31,118.872) 322.322,118.872 R25.2@322.326,118.868 ; R25.2@322.326,118.872 J13.1@325.755,118.872
  Bottom w0.152: J10.14@290.83,96.52 290.715,96.635 290.715,97.409 289.697,98.427 289.697,100.359 290.928,101.589 306.83,101.589 309.695,98.725 314.909,98.725 315.308,99.124 315.308,110.748 315.695,111.134 320.128,111.134 320.218,111.224 320.218,118.562 320.454,118.798 321.231,118.798 v1@321.317,118.885
GND: C1.2 C2.2 C4.1 C5.2 C6.1 C11.2 C12.2 C15.2 C16.2 C17.2 D4.2 D5.2 D6.1 J3.3 J4.3 J5.6 J9.4 J10.1 J10.3 J10.17 J10.19 J11.21 J11.22 J12.2 J13.2 J14.5 J14.6 J16.5 J17.2 L2.2 Q1.1 R6.2 R7.2 S2.5 S2.6 S2.7 S2.8 U1.2 U2.1 U2.3 U2.6 U4.3 | length 23
  Top w0.381: R7.2@250.301,135.255 250.301,136.636 v1(250.317,136.652) ; U2.1@263.398,99.187 263.398,100.869 263.621,101.092 v1(264.668,101.092) v1(265.938,101.092) ; v1(265.359,86.683) 266.659,86.683 266.728,86.614 U1.2@266.765,86.651 ; U2.3@265.938,99.314 v1(265.938,100.203) v1(265.938,101.092) ; U2.6@265.938,102.997 v1(265.938,102.108) v1(265.938,101.092) ; C1.2@272.65,90.666 272.65,89.3 273.177,88.773 273.177,87.472 273.4,87.249 273.939,87.249 ; D4.2@295.377,140.869 v1(295.377,142.664) ; D5.2@299.202,140.819 v1(299.202,142.613) ; D6.1@303.139,140.819 v1(303.139,142.613)
  Top w0.762: v1(316.992,93.726) C17.2@318.262,93.726 v1(318.262,94.996)
  other v1: 303.53,82.423 311.15,82.423 280.67,86.233 284.48,86.233 305.435,86.233 309.245,86.233 275.971,86.741 275.971,87.63 274.066,88.519 275.209,88.519 262.636,88.773 263.652,88.773 262.636,90.043 263.652,90.043 303.53,90.043 307.34,90.043 311.15,90.043 253.619,90.932 254.508,90.932 253.619,91.821 254.508,91.821 277.845,94.312 276.63,94.336 263.525,101.092 259.461,104.394 318.77,105.283 259.461,105.41 260.477,105.41 261.366,105.41 259.461,106.426 259.461,107.442 316.865,109.093 263.144,110.49 264.033,110.49 263.144,111.379 264.033,111.379 257.81,112.903 261.62,112.903 265.43,112.903 314.96,112.903 318.77,112.903 272.585,113.641 272.513,115.045 259.715,116.713 263.525,116.713 267.335,116.713 316.865,116.713 288.348,120.48 257.81,120.523 261.62,120.523 265.43,120.523 314.96,120.523 318.77,120.523 301.737,120.609 297.468,120.947 272.383,123.501 252.476,123.698 253.873,123.698 233.131,123.797 235.494,123.806 230.768,123.825 237.858,123.851 259.715,124.333 263.525,124.333 267.335,124.333 316.865,124.333 252.476,125.031 253.873,125.031 233.131,125.321 235.494,125.33 230.768,125.349 237.858,125.375 272.385,126.119 252.476,126.365 253.873,126.365 233.131,126.845 235.494,126.854 230.768,126.873 237.858,126.899 257.81,128.143 261.62,128.143 265.43,128.143 307.34,128.143 311.15,128.143 233.131,128.369 235.494,128.378 230.768,128.397 237.858,128.423 272.386,128.544 233.131,129.893 235.494,129.902 230.768,129.921 237.858,129.947 233.131,131.417 235.494,131.426 230.768,131.445 237.858,131.471 280.67,131.953 284.48,131.953 288.29,131.953 309.245,131.953 233.131,132.941 235.494,132.95 230.768,132.969 237.858,132.995 238.76,135.763 242.57,135.763 246.38,135.763 314.96,135.763 318.77,135.763 240.665,139.573 244.475,139.573 252.095,139.573 255.905,139.573
LPWM1: J8.1 R9.2 U5.7 | length 35.7
  Top w0.152: v1(288.627,113.183) R9.2@288.627,114.288
  Top w0.254: 288.089,114.592 290.862,114.592 291.266,114.996 292.409,114.996 U5.7@292.423,115.01
  Bottom w0.152: v1(288.627,113.183) 290.037,114.593 290.037,128.469 291.416,129.848 291.416,140.287 290.936,140.767 290.132,140.767 J8.1@289.892,141.007 ; J8.1@290.146,140.957 J8.1@290.146,140.993
LPWM2: J8.3 R8.2 U5.6 | length 33
  Top w0.152: R8.2@288.646,116.631 v1(288.646,117.884)
  Top w0.254: R8.2@288.591,116.612 288.691,116.711 290.578,116.711 291.02,116.268 U5.6@292.419,116.268
  Bottom w0.152: J8.3@287.172,140.82 J8.3@287.662,141.31 ; J8.3@287.232,140.817 287.493,140.557 287.493,140.211 287.861,139.843 290.136,139.843 290.984,138.995 290.984,130.064 289.635,128.714 289.635,118.567 288.954,117.886 288.648,117.886 v1(288.646,117.884)
"motor L+": J12.10 R10.1 | length 9.5
  Top w0.152: 304.164,114.808 304.183,114.808
  Top w0.254: R10.1@302.895,114.808 304.164,114.808 305.111,115.755 310.535,115.755 311.45,116.67 J12.10@311.45,116.84
"motor L-": J12.9 R11.1 | length 6
  Top w0.254: R11.1@302.895,116.84 302.909,116.826 308.896,116.826 J12.9@308.91,116.84
"motor R+": J12.8 R3.1 | length 12.8
  Top w0.254: R3.1@302.895,124.079 302.992,124.176 303.702,124.176 304.171,123.707 304.171,121.738 307.619,118.29 310.561,118.29 311.381,119.111 J12.8@311.381,119.41
"motor R-": J12.7 R4.1 | length 10.8
  Top w0.254: R4.1@302.879,126.111 302.928,126.16 303.98,126.16 304.689,125.452 304.689,122.065 307.373,119.38 J12.7@308.905,119.38
NetC1_1: C1.1 D1.2 U1.1 U1.3 | length 6.9
  Top w0.152: U1.3@266.765,85.381 268.134,85.381 268.314,85.561 268.314,87.826 268.225,87.915 U1.1@267.645,87.915 ; U1.1@266.765,87.921 U1.1@266.767,87.923 ; D1.2@268.079,90.499 D1.2@268.222,90.642 ; D1.2@268.63,90.702 268.648,90.702 268.684,90.666 C1.1@270.65,90.666 C1.1@270.626,90.642
NetC3_1: C3.1 U2.2 | length 5.2
  Top w0.152: C3.1@262.091,95.123 262.091,96.805 262.18,96.894 264.318,96.894 264.668,97.244 U2.2@264.668,98.044
NetC3_2: C3.2 U2.4 | length 2.8
  Top w0.152: C3.2@266.954,96.012 266.954,97.028 267.208,97.282 U2.4@267.208,98.744
NetC8_1: C8.1 C9.2 D2.2 LM1.1
NetC12_1: C12.1 D3.2 U4.1 U4.2
NetD4_1: D4.1 R12.2 | length 3.8
  Top w0.381: R12.2@295.377,135.044 D4.1@295.377,138.856
NetD5_1: D5.1 R13.2 | length 3.8
  Top w0.381: R13.2@299.202,134.993 D5.1@299.202,138.805
NetD6_2: D6.2 R14.2 | length 3.8
  Top w0.381: R14.2@303.139,134.993 D6.2@303.139,138.805
NetD7_1: D7.1 R15.2 | length 3.8
  Top w0.381: R15.2@258.484,135.005 D7.1@258.484,138.818
NetD8_1: D8.1 R16.2 | length 3.8
  Top w0.381: R16.2@262.324,134.935 D8.1@262.324,138.747
NetD9_1: D9.1 LS1.2 Q1.3 | length 8.2
  Top w0.762: D9.1@321.564,95.758 Q1.3@321.564,99.314 323.977,99.314 325.12,100.457 LS1.2@325.755,100.457
NetJ4_1: J4.1 L1.2
NetJ8_5: J8.5 J8.6 S3.1 | length 9.2
  Top w0.152: S3.1@278.672,139.426 278.672,139.501 280.127,140.957 J8.5@284.695,140.957 284.695,138.495 J8.6@284.643,138.443
NetQ1_2: Q1.2 R31.2 | length 3.6
  Top w0.152: R31.2@318.262,101.584 319.897,101.584 320.897,100.584 Q1.2@321.437,100.584
NetR3_2: R3.2 U3.2 | length 3.8
  Top w0.254: U3.2@297.115,124.587 299.596,124.587 300.104,124.079 R3.2@300.736,124.079
NetR4_2: R4.2 U3.3 | length 4
  Top w0.254: U3.3@297.115,125.857 299.593,125.857 299.847,126.111 R4.2@300.879,126.111 R4.2@300.99,126.111
NetR5_2: R5.2 R7.1 U4.5 | length 7.6
  Top w0.152: 246.672,131.826 246.761,131.915 ; 246.761,133.007 246.85,133.096 ; R5.2@248.285,133.096 R5.2@248.301,133.096
  Top w0.381: U4.5@244.038,131.824 244.071,131.857 246.703,131.857 ; 246.761,131.915 246.761,133.007 ; 246.85,133.096 R5.2@248.285,133.096 ; R5.2@248.301,133.112 R7.1@248.301,135.255
NetR10_2: R10.2 U5.2 | length 3.6
  Top w0.254: U5.2@297.369,114.998 297.422,114.945 300.758,114.945 R10.2@300.895,114.808
NetR11_2: R11.2 U5.3 | length 3.5
  Top w0.254: U5.3@297.579,116.294 299.448,116.294 299.994,116.84 R11.2@300.895,116.84
NetR21_2: R21.2 U6.2 | length 3
  Top w0.254: U6.2@298.008,105.41 299.894,105.41 300.163,105.142 300.843,105.142 R21.2@300.895,105.09
NetR24_2: R24.2 U6.3 | length 3.7
  Top w0.254: U6.3@297.325,106.642 299.803,106.642 300.055,106.894 300.864,106.894 R24.2@300.895,106.924
PWM5: J11.16 R21.1 | length 37.2
  Top w0.152: J11.16@280.17,109.22 J11.16@280.202,109.22 ; 299.563,98.512 299.592,98.483
  Top w0.254: J11.16@280.202,109.22 283.083,106.339 283.083,103.283 284.739,101.627 299.048,101.627 299.589,101.086 299.589,98.486 ; 299.581,98.468 300.023,98.026 301.973,98.026 302.121,98.175 302.121,103.423 302.895,104.197 R21.1@302.895,105.09
RPWM1: J8.2 R2.2 U3.7 | length 20.8
  Top w0.152: v1(288.562,122.9) 288.562,123.923 R2.2@288.591,123.952
  Top w0.254: R2.2@289.036,123.952 290.195,123.952 290.83,124.587 U3.7@291.973,124.587
  Bottom w0.152: v1@288.574,122.931 v1@288.574,122.982 ; v1@288.688,122.822 288.749,122.822 288.767,122.805 289.12,122.805 289.209,122.894 289.209,128.914 290.495,130.201 290.495,137.486 290.11,137.871 290.11,138.048 J8.2@290.171,138.109
RPWM2: J8.4 R1.2 U3.6 | length 17.4
  Top w0.152: v1(288.607,127.381) 288.607,125.951 R1.2@288.591,125.935 R1.2@288.669,125.857
  Top w0.254: 289.114,125.857 U3.6@291.465,125.857
  Bottom w0.152: J8.4@287.1,138.37 J8.4@287.144,138.326 ; J8.4@287.104,138.199 287.453,138.199 288.259,137.393 289.34,137.393 289.961,136.773 289.961,130.465 288.744,129.248 288.744,127.628 288.607,127.491 v1(288.607,127.381)
RX: J9.3 J11.11 | length 55.6
  Top w0.152: J11.11@277.906,114.73 278.06,114.73 279.027,115.697 281.321,115.697 281.41,115.786 281.41,117.559 284.235,120.384 284.235,127.39 286.66,129.815 305.13,129.815 311.36,136.045 311.36,139.635 311.89,140.164 313.605,140.164 315.046,141.605 J9.3@315.087,141.605
SERVODUTY: J15.1 R19.2 U6.7 | length 81.6
  Top w0.152: v1(283.716,107.856) 283.826,107.856 284.115,107.568 284.115,105 284.396,104.718 v1(285.253,104.718) ; v1(288.547,103.642) R19.2@288.547,104.731
  Top w0.254: R19.2@288.547,104.731 R19.2@288.591,104.775 ; R19.2@288.772,104.764 290.432,104.764 291.04,105.372 U6.7@292.183,105.372
  Bottom w0.152: J15.1@245.237,141.569 247.883,138.922 251.272,138.922 258.697,131.498 265.601,131.498 267.238,133.134 275.371,133.134 276.022,132.483 276.022,108.202 276.111,108.113 283.424,108.113 283.681,107.856 v1(283.716,107.856) ; 284.972,104.723 v1@285.115,104.581 ; v1(285.253,104.718) 285.253,103.907 285.518,103.642 v1(288.547,103.642)
TX: J9.2 J11.9 | length 51.3
  Top w0.152: J11.9@277.611,116.886 277.763,116.886 278.871,117.994 281.015,117.994 283.718,120.696 283.718,127.635 286.406,130.323 304.742,130.323 310.769,136.35 310.769,139.827 J9.2@312.547,141.605